# EAGLE board EZFOC_V1 (EAGLE 9.6.2), part 1 of 2
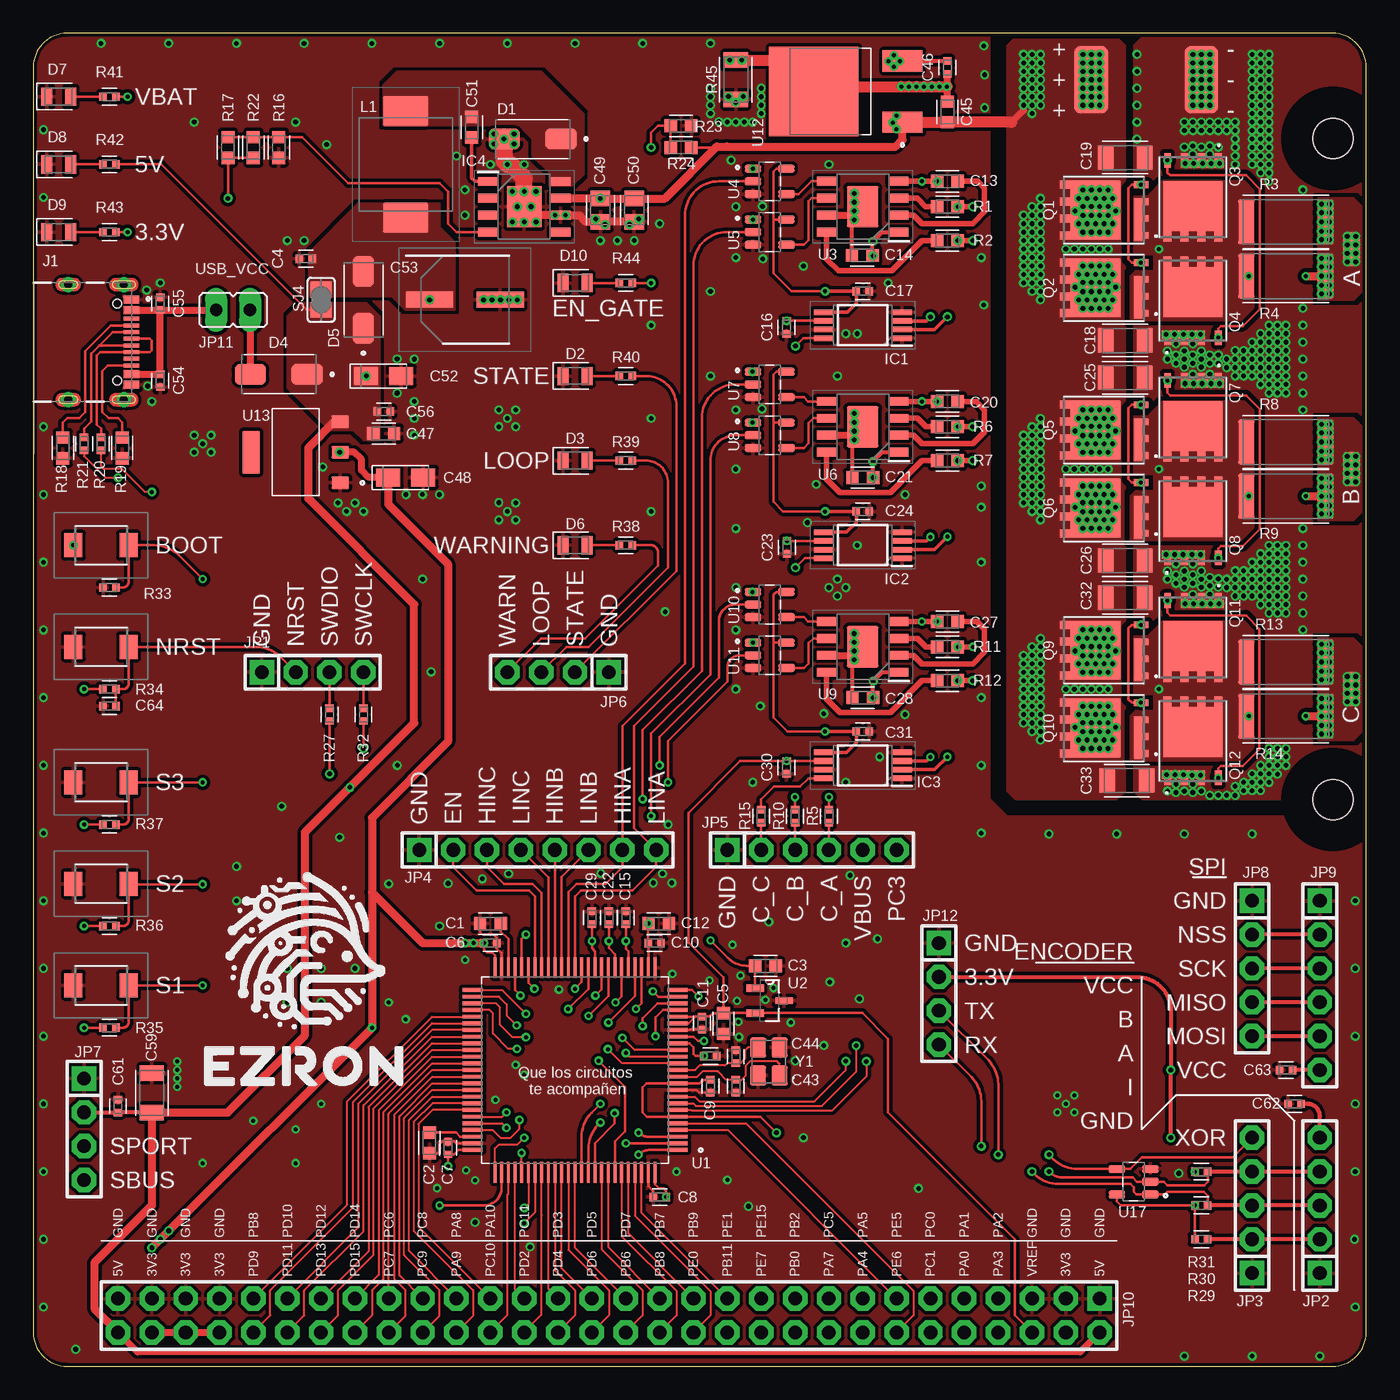
[diagram p0: board, top side]
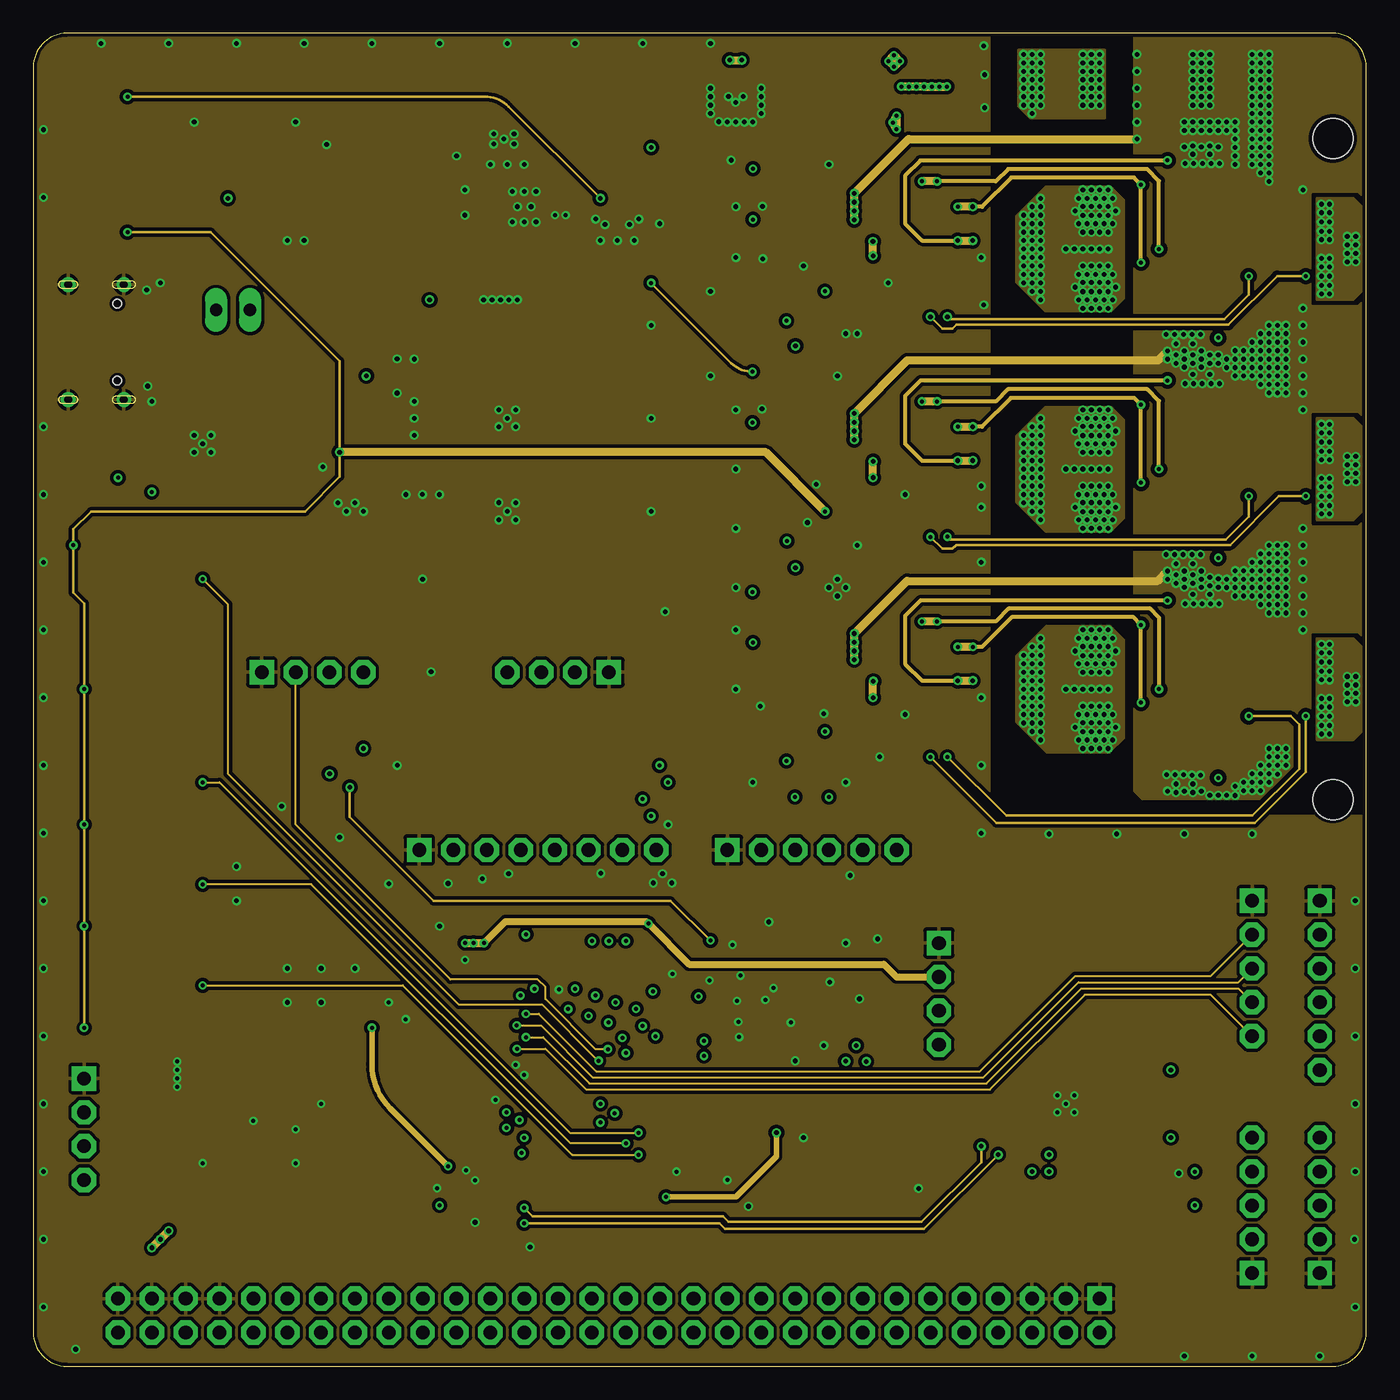
[diagram p1: board, inner layer Route2]
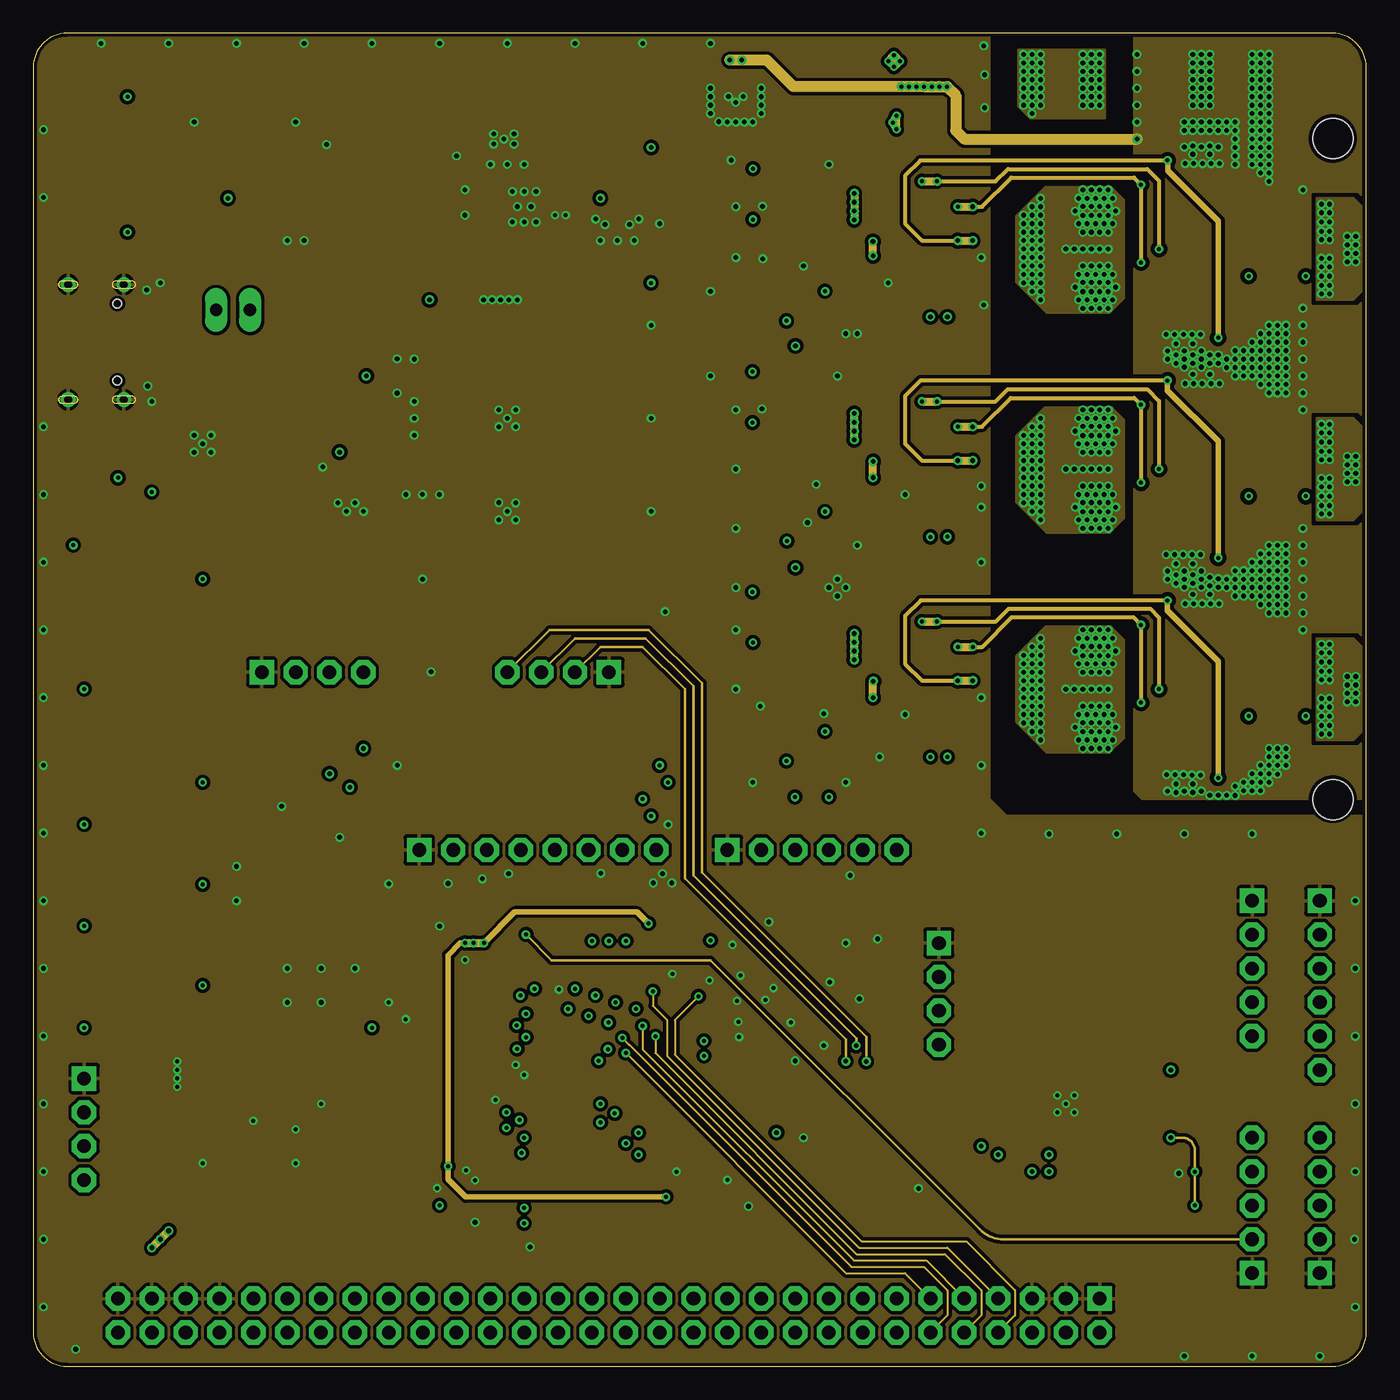
[diagram p2: board, inner layer Route15]
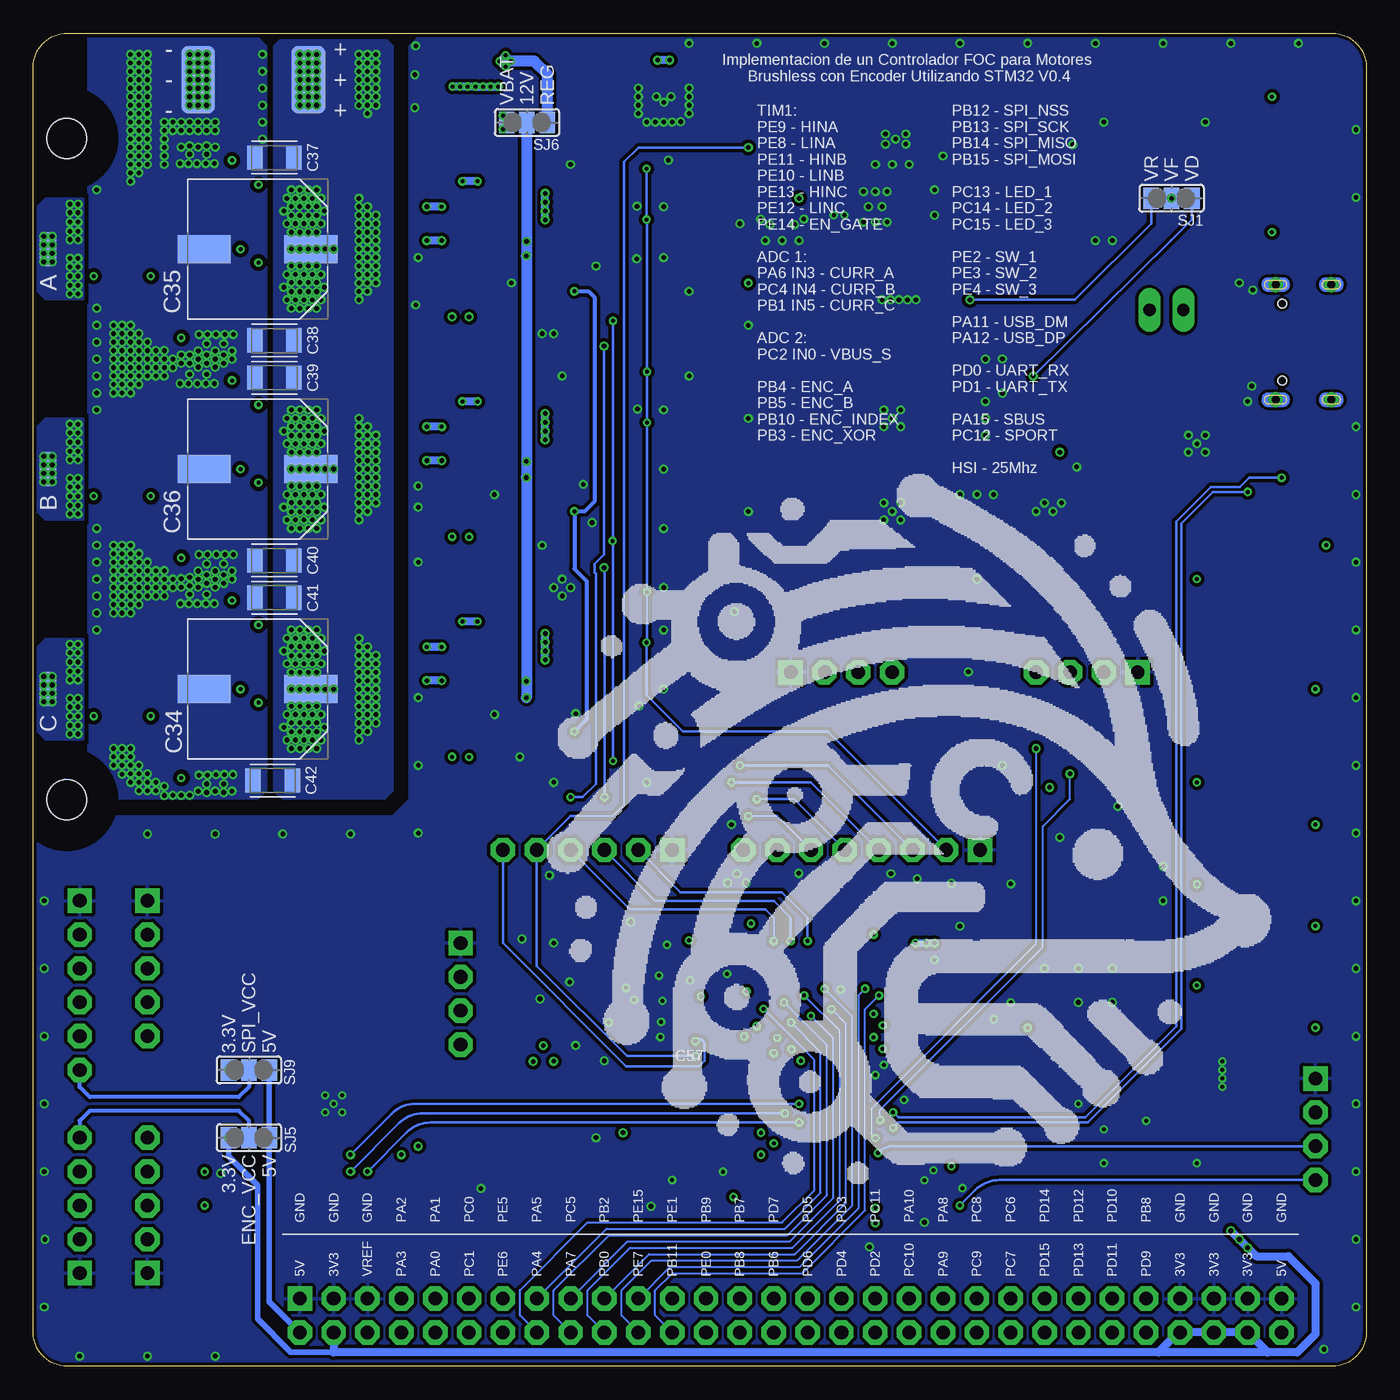
[diagram p3: board, bottom side, seen from below]

Size 100 x 100 mm. Coordinates in mm from the lower left corner, seen from the top.
Outline: 2.5,0 97.5,0 arc90 100,2.5 100,97.5 arc90 97.5,100 2.5,100 arc90 0,97.5 0,2.5 arc90 2.5,0
Copper layers (1+2*15+16): Top 0.035mm / dielectric 0.2mm / Route2 0.0175mm / dielectric 1.065mm / Route15 0.0175mm / dielectric 0.2mm / Bottom 0.035mm
Design rules "jlcpcb-4layers *": minimum track width 3.5mil, minimum drill 0.2mm, track to track 0.16mm, track to pad 0.2mm, pad to pad 5mil, via to via 0.5mm, smd to smd 5mil, copper to edge 0.2mm, drill to drill 6mil, minimum pad ring 10mil, minimum via ring 0.16mm, stop-mask expansion 0.05mm, vias tented up to drill 16mil, thermal gap 10mil
Net classes: 0 default: width 0.152 mm, drill 0.3 mm; 1 signal: width 0.152 mm, drill 0.3 mm
Holes 3 mm at 97.5,42.5 97.5,92.11
tRestrict: area 94,88.6 to 101,95.6; area 94,39 to 101,46
bRestrict: area 94,88.6 to 101,95.6; area 94,39 to 101,46

## Footprints (pad centres in the part's own frame; a part is rotated, then mirrored left to right if it is on the bottom)
SMD1,27-2,54 = smd 1.27 x 2.54: 1 0,0
SKRKAEE020 = smd 1.35 x 1.8: 1 -2.075,0; 2 2.075,0
0603 = smd 0.921 x 0.97: 1 -0.775,0; 2 0.775,0
0402 = smd 0.56 x 0.629: 1 -0.485,0; 2 0.485,0
1206 = smd 1.165 x 1.815: 1 -1.475,0; 2 1.475,0
CAPAE1030X1050N = smd 4 x 2.1: 1 -4,0; 2 4,0
CAPMP3216X180N = smd 1.796 x 1.35: 1 -1.31,0; 2 1.31,0
0805 = smd 1.165 x 1.465: 1 -0.875,0; 2 0.875,0
CAPAE660X800N = smd 3.55 x 1.2: 1 -2.65,0; 2 2.65,0
DIOM5226X240N = smd 2.33 x 1.55: A 2.135,0; C -2.135,0
LEDC2012X110N_FLAT-B = smd 0.8 x 1.362: A 0.9,0; C -0.9,0
SOP65P640X120-8N = smd 1.475 x 0.42: 1 -2.938,0.975; 2 -2.938,0.325; 3 -2.938,-0.325; 4 -2.938,-0.975; 5 2.938,-0.975; 6 2.938,-0.325; 7 2.938,0.325; 8 2.938,0.975
SOIC127P600X170-9N = smd 1.525 x 0.65: 1 -2.712,1.905; 2 -2.712,0.635; 3 -2.712,-0.635; 4 -2.712,-1.905; 5 2.712,-1.905; 6 2.712,-0.635; 7 2.712,0.635; 8 2.712,1.905 | smd 2.6 x 3.1: 9 0,0
GCT_USB4105-GF-A = smd 0.6 x 1.15: A1_B12 -3.2,4.755; A4_B9 -2.4,4.755; B1_A12 3.2,4.755; B4_A9 2.4,4.755 | smd 0.3 x 1.15: A5 -1.25,4.755; A6 -0.25,4.755; A7 0.25,4.755; A8 1.25,4.755; B5 1.75,4.755; B6 0.75,4.755; B7 -0.75,4.755; B8 -1.75,4.755 | drill 0.6 pad 1: SH1 -4.32,4.18; SH2 4.32,4.18; SH3 -4.32,0; SH4 4.32,0 | hole 0.65: 2.89,3.68; -2.89,3.68
1X04 = drill 1.016 square: 1 -3.81,0 | drill 1.016 octagon: 2 -1.27,0; 3 1.27,0; 4 3.81,0
1X05 = drill 1.016 square: 1 -5.08,0 | drill 1.016 octagon: 2 -2.54,0; 3 0,0; 4 2.54,0; 5 5.08,0
1X08 = drill 1.016 square: 1 -8.89,0 | drill 1.016 octagon: 2 -6.35,0; 3 -3.81,0; 4 -1.27,0; 5 1.27,0; 6 3.81,0; 7 6.35,0; 8 8.89,0
1X06 = drill 1.016 square: 1 -6.35,0 | drill 1.016 octagon: 2 -3.81,0; 3 -1.27,0; 4 1.27,0; 5 3.81,0; 6 6.35,0
2X30 = drill 1.016 square: 1 -38.1,-1.27 | drill 1.016 octagon: 2 -38.1,1.27; 3 -35.56,-1.27; 4 -35.56,1.27; 5 -33.02,-1.27; 6 -33.02,1.27; 7 -30.48,-1.27; 8 -30.48,1.27; 9 -27.94,-1.27; 10 -27.94,1.27; 11 -25.4,-1.27; 12 -25.4,1.27; 13 -22.86,-1.27; 14 -22.86,1.27; 15 -20.32,-1.27; 16 -20.32,1.27; 17 -17.78,-1.27; 18 -17.78,1.27; 19 -15.24,-1.27; 20 -15.24,1.27; 21 -12.7,-1.27; 22 -12.7,1.27; 23 -10.16,-1.27; 24 -10.16,1.27; 25 -7.62,-1.27; 26 -7.62,1.27; 27 -5.08,-1.27; 28 -5.08,1.27; 29 -2.54,-1.27; 30 -2.54,1.27; 31 0,-1.27; 32 0,1.27; 33 2.54,-1.27; 34 2.54,1.27; 35 5.08,-1.27; 36 5.08,1.27; 37 7.62,-1.27; 38 7.62,1.27; 39 10.16,-1.27; 40 10.16,1.27; 41 12.7,-1.27; 42 12.7,1.27; 43 15.24,-1.27; 44 15.24,1.27; 45 17.78,-1.27; 46 17.78,1.27; 47 20.32,-1.27; 48 20.32,1.27; 49 22.86,-1.27; 50 22.86,1.27; 51 25.4,-1.27; 52 25.4,1.27; 53 27.94,-1.27; 54 27.94,1.27; 55 30.48,-1.27; 56 30.48,1.27; 57 33.02,-1.27; 58 33.02,1.27; 59 35.56,-1.27; 60 35.56,1.27
JP1 = drill 0.914 long: 1 0,-1.27; 2 0,1.27
SMD6.6X7.3MM = smd 2.25 x 3.4: 1 -4,0; 2 4,0
SMD2,54-5,08 = smd 2.54 x 5.08: 1 0,0
TDSON-8FL = smd 0.5 x 0.5: 1 -2.764,1.905; 2 -2.764,0.635; 3 -2.764,-0.635 | smd 1.1 x 0.5: 4 -2.464,-1.905 | smd 0.8 x 0.6: 5 3.236,-1.905; 6 3.236,-0.635; 7 3.236,0.635; 8 3.236,1.905 | smd 3.75 x 4.41: 9 0.961,0 | smd 0.6 x 3.2: 10 -2.214,0.715
2512 = smd 1.231 x 3.37: 1 -2.97,0; 2 2.97,0
SJ_2 = smd 1.168 x 1.6: 1 -1.524,0; 2 0,0; 3 1.524,0
SJ = smd 1.168 x 1.6: 1 -0.762,0; 2 0.762,0
LQFP100 = smd 1.56 x 0.28: 1 -7.68,6; 2 -7.68,5.5; 3 -7.68,5; 4 -7.68,4.5; 5 -7.68,4; 6 -7.68,3.5; 7 -7.68,3; 8 -7.68,2.5; 9 -7.68,2; 10 -7.68,1.5; 11 -7.68,1; 12 -7.68,0.5; 13 -7.68,0; 14 -7.68,-0.5; 15 -7.68,-1; 16 -7.68,-1.5; 17 -7.68,-2; 18 -7.68,-2.5; 19 -7.68,-3; 20 -7.68,-3.5; 21 -7.68,-4; 22 -7.68,-4.5; 23 -7.68,-5; 24 -7.68,-5.5; 25 -7.68,-6; 51 7.68,-6; 52 7.68,-5.5; 53 7.68,-5; 54 7.68,-4.5; 55 7.68,-4; 56 7.68,-3.5; 57 7.68,-3; 58 7.68,-2.5; 59 7.68,-2; 60 7.68,-1.5; 61 7.68,-1; 62 7.68,-0.5; 63 7.68,0; 64 7.68,0.5; 65 7.68,1; 66 7.68,1.5; 67 7.68,2; 68 7.68,2.5; 69 7.68,3; 70 7.68,3.5; 71 7.68,4; 72 7.68,4.5; 73 7.68,5; 74 7.68,5.5; 75 7.68,6 | smd 0.28 x 1.56: 26 -6,-7.68; 27 -5.5,-7.68; 28 -5,-7.68; 29 -4.5,-7.68; 30 -4,-7.68; 31 -3.5,-7.68; 32 -3,-7.68; 33 -2.5,-7.68; 34 -2,-7.68; 35 -1.5,-7.68; 36 -1,-7.68; 37 -0.5,-7.68; 38 0,-7.68; 39 0.5,-7.68; 40 1,-7.68; 41 1.5,-7.68; 42 2,-7.68; 43 2.5,-7.68; 44 3,-7.68; 45 3.5,-7.68; 46 4,-7.68; 47 4.5,-7.68; 48 5,-7.68; 49 5.5,-7.68; 50 6,-7.68; 76 6,7.68; 77 5.5,7.68; 78 5,7.68; 79 4.5,7.68; 80 4,7.68; 81 3.5,7.68; 82 3,7.68; 83 2.5,7.68; 84 2,7.68; 85 1.5,7.68; 86 1,7.68; 87 0.5,7.68; 88 0,7.68; 89 -0.5,7.68; 90 -1,7.68; 91 -1.5,7.68; 92 -2,7.68; 93 -2.5,7.68; 94 -3,7.68; 95 -3.5,7.68; 96 -4,7.68; 97 -4.5,7.68; 98 -5,7.68; 99 -5.5,7.68; 100 -6,7.68
SOT95P237X112-3N = smd 1.321 x 0.559: 1 -1.092,0.94; 2 -1.092,-0.94 | smd 1.321 x 0.508: 3 1.092,0
SOIC127P600X170-9N' = smd 1.525 x 0.65: 1 -2.712,1.905; 2 -2.712,0.635; 3 -2.712,-0.635; 4 -2.712,-1.905; 5 2.712,-1.905; 6 2.712,-0.635; 7 2.712,0.635; 8 2.712,1.905 | smd 2.4 x 3.1: 9 0,0
SOT95P280X145-5N = smd 1.21 x 0.59: 1 -1.255,0.95; 2 -1.255,0; 3 -1.255,-0.95; 4 1.255,-0.95; 5 1.255,0.95
VREG_L78M12CDT-TR = smd 3 x 1.6: 1 -4.25,2.3; 3 -4.25,-2.3 | smd 6.7 x 6.7: 2 2.4,0
SOT229P700X180-4N = smd 1.31 x 0.93: 1 -3.345,2.29; 2 -3.345,0; 3 -3.345,-2.29 | smd 1.31 x 3.24: 4 3.345,0
SMD3225-4P = smd 1.5 x 1.2: 1 -1.05,-0.8; 2 1.05,-0.8; 3 1.05,0.8; 4 -1.05,0.8

## Placement (x,y rotation side)
A  PAD1.27X2.54  [SMD1,27-2,54]  98.9,83.81 0 bottom
A1  PAD1.27X2.54  [SMD1,27-2,54]  98.9,83.81 0 top
B  PAD1.27X2.54  [SMD1,27-2,54]  98.9,67.31 0 bottom
B1  PAD1.27X2.54  [SMD1,27-2,54]  98.9,67.31 0 top
BOOT  TS-1088  [SKRKAEE020]  5.08,61.59 180 top
C  PAD1.27X2.54  [SMD1,27-2,54]  98.9,50.8 0 bottom
C1  2.2uF  [0603]  34.29,33.21 180 top
C2  2.2uF  [0603]  29.72,16.76 270 top
C3  1uF  [0603]  54.93,30.03 0 top
C4  0.1uF  [0402]  20.45,83.08 180 top
C5  1uF  [0603]  51.78,25.71 270 top
C6  0.1uF  [0402]  34.29,31.74 0 top
C7  0.1uF  [0402]  31.11,16.38 90 top
C8  0.1uF  [0402]  46.99,12.7 180 top
C9  0.1uF  [0402]  50.8,21.01 270 top
C10  0.1uF  [0402]  46.61,31.74 0 top
C11  0.1uF  [0402]  50.16,25.74 270 top
C12  4.7uF  [0603]  46.93,33.21 0 top
C13  0.1uF  [0603]  68.58,88.9 180 top
C14  2.2uF  [0603]  62.2,83.34 180 top
C15  0.1uF  [0402]  44.45,33.65 90 top
C16  0.1uF  [0402]  56.52,77.94 270 top
C17  0.1uF  [0402]  62.23,80.64 0 top
C18  22uF  [1206]  81.92,76.96 0 top
C19  22uF  [1206]  81.92,90.67 0 top
C20  0.1uF  [0603]  68.58,72.38 180 top
C21  2.2uF  [0603]  62.23,66.67 180 top
C22  0.1uF  [0402]  43.18,33.65 90 top
C23  0.1uF  [0402]  56.55,61.43 270 top
C24  0.1uF  [0402]  62.23,64.13 0 top
C25  22uF  [1206]  81.92,74.16 0 top
C26  22uF  [1206]  81.92,60.45 0 top
C27  0.1uF  [0603]  68.58,55.88 180 top
C28  2.2uF  [0603]  62.23,50.16 180 top
C29  0.1uF  [0402]  41.91,33.65 90 top
C30  0.1uF  [0402]  56.52,44.92 270 top
C31  0.1uF  [0402]  62.23,47.62 0 top
C32  22uF  [1206]  81.92,57.65 0 top
C33  22uF  [1206]  82.04,43.94 0 top
C34  470uF  [CAPAE1030X1050N]  83.19,50.8 180 bottom
C35  470uF  [CAPAE1030X1050N]  83.19,83.81 180 bottom
C36  470uF  [CAPAE1030X1050N]  83.19,67.31 180 bottom
C37  22uF  [1206]  81.92,90.67 180 bottom
C38  22uF  [1206]  81.92,76.96 180 bottom
C39  22uF  [1206]  81.92,74.16 180 bottom
C40  22uF  [1206]  81.92,60.45 180 bottom
C41  22uF  [1206]  81.92,57.65 180 bottom
C42  22uF  [1206]  82.04,43.94 180 bottom
C43  12pF  [0402]  52.7,21.01 270 top
C44  12pF  [0402]  52.7,23.24 90 top
C45  1uF  [0603]  68.58,94.1 90 top
C46  0.1uF  [0402]  68.58,97.44 270 top
C47  1uF  [0603]  26.29,69.97 0 top
C48  10uF  [CAPMP3216X180N]  27.94,66.67 0 top
C49  10uF  [0805]  42.55,86.74 270 top
C50  10uF  [0805]  45.09,86.74 270 top
C51  0.01uF  [0603]  32.89,92.96 90 top
C52  10uF  [CAPMP3216X180N]  26.29,74.29 0 top
C53  220uF  [CAPAE660X800N]  32.38,80 0 top
C54  0.1uF  [0402]  9.53,73.94 270 top
C55  0.1uF  [0402]  9.53,79.72 90 top
C56  0.1uF  [0402]  26.29,71.62 0 top
C57  1nF  [0402]  50.8,23.27 0 top
C59  22uF  [1206]  8.89,20.51 90 top
C61  0.1uF  [0402]  6.35,19.52 90 top
C62  0.1uF  [0402]  94.61,19.68 180 top
C63  0.1uF  [0402]  93.98,22.22 180 top
C64  0.1uF  [0402]  5.71,49.52 180 top
C65  PAD1.27X2.54  [SMD1,27-2,54]  98.9,50.8 0 top
D1  B340A  [DIOM5226X240N]  37.47,92.07 180 top
D2  LED_BLUE  [LEDC2012X110N_FLAT-B]  40.64,74.29 0 top
D3  LED_BLUE  [LEDC2012X110N_FLAT-B]  40.64,67.94 0 top
D4  B340A  [DIOM5226X240N]  18.41,74.42 180 top
D5  B340A  [DIOM5226X240N]  24.77,80 90 top
D6  LED_BLUE  [LEDC2012X110N_FLAT-B]  40.64,61.59 0 top
D7  LED_BLUE  [LEDC2012X110N_FLAT-B]  1.91,95.25 0 top
D8  LED_BLUE  [LEDC2012X110N_FLAT-B]  1.91,90.16 0 top
D9  LED_BLUE  [LEDC2012X110N_FLAT-B]  1.91,85.09 0 top
D10  LED_BLUE  [LEDC2012X110N_FLAT-B]  40.64,81.28 0 top
IC1  INA240A1PW  [SOP65P640X120-8N]  62.23,78.1 180 top
IC2  INA240A1PW  [SOP65P640X120-8N]  62.23,61.59 180 top
IC3  INA240A1PW  [SOP65P640X120-8N]  62.23,45.08 180 top
IC4  TPS5430DDAR  [SOIC127P600X170-9N]  36.83,86.99 0 top
J1  TYPE-C_16PIN_2MD__073_C  [GCT_USB4105-GF-A]  2.62,76.83 270 top
JP1  [1X04]  20.95,52.06 0 top
JP2  [1X05]  96.52,12.06 90 top
JP3  [1X05]  91.44,12.06 90 top
JP4  [1X08]  37.85,38.73 0 top
JP5  [1X06]  58.42,38.73 0 top
JP6  [1X04]  39.37,52.06 180 top
JP7  [1X04]  3.81,17.77 270 top
JP8  [1X05]  91.44,29.84 270 top
JP9  [1X06]  96.52,28.57 270 top
JP10  [2X30]  41.91,3.8 180 top
JP11  [JP1]  14.99,79.24 270 top
JP12  [1X04]  67.94,27.94 270 top
L1  15uH  [SMD6.6X7.3MM]  27.94,90.16 270 top
NRST  TS-1088  [SKRKAEE020]  5.08,53.97 180 top
PAD1  PAD2.54X5.08  [SMD2,54-5,08]  79.38,96.52 0 bottom
PAD2  PAD2.54X5.08  [SMD2,54-5,08]  87.63,96.52 0 top
PAD3  PAD2.54X5.08  [SMD2,54-5,08]  87.63,96.52 0 bottom
PAD4  PAD2.54X5.08  [SMD2,54-5,08]  79.38,96.52 0 top
Q1  BSC011N03LSI_FL  [TDSON-8FL]  80.64,86.74 180 top
Q2  BSC011N03LSI_FL  [TDSON-8FL]  80.64,80.89 180 top
Q3  BSC011N03LSI_FL  [TDSON-8FL]  87,88.01 270 top
Q4  BSC011N03LSI_FL  [TDSON-8FL]  87,79.62 90 top
Q5  BSC011N03LSI_FL  [TDSON-8FL]  80.64,70.23 180 top
Q6  BSC011N03LSI_FL  [TDSON-8FL]  80.64,64.38 180 top
Q7  BSC011N03LSI_FL  [TDSON-8FL]  87,71.5 270 top
Q8  BSC011N03LSI_FL  [TDSON-8FL]  87,63.11 90 top
Q9  BSC011N03LSI_FL  [TDSON-8FL]  80.64,53.72 180 top
Q10  BSC011N03LSI_FL  [TDSON-8FL]  80.64,47.87 180 top
Q11  BSC011N03LSI_FL  [TDSON-8FL]  87,54.99 270 top
Q12  BSC011N03LSI_FL  [TDSON-8FL]  87,46.6 90 top
R1  1  [0603]  68.58,86.99 0 top
R2  1  [0603]  68.58,84.45 0 top
R3  1m  [2512]  93.98,85.85 0 top
R4  1m  [2512]  93.98,81.78 0 top
R5  10  [0402]  59.69,41.27 90 top
R6  1  [0603]  68.58,70.48 0 top
R7  1  [0603]  68.58,67.94 0 top
R8  1m  [2512]  93.98,69.34 0 top
R9  1m  [2512]  93.98,65.27 0 top
R10  10  [0402]  57.15,41.27 90 top
R11  1  [0603]  68.58,53.97 0 top
R12  1  [0603]  68.58,51.43 0 top
R13  1m  [2512]  93.98,52.83 0 top
R14  1m  [2512]  93.98,48.76 0 top
R15  10  [0402]  54.61,41.27 90 top
R16  1.6k  [0603]  18.41,91.44 90 top
R17  5.1k  [0603]  14.61,91.44 270 top
R18  5.1k  [0603]  2.22,68.89 270 top
R19  5.1k  [0603]  6.67,68.89 270 top
R20  22  [0402]  5.08,69.21 90 top
R21  22  [0402]  3.81,69.21 90 top
R22  2.4M  [0603]  16.51,91.44 270 top
R23  8.2k  [0603]  48.59,93.05 180 top
R24  75k  [0603]  48.59,91.44 180 top
R27  22  [0402]  22.23,48.89 90 top
R29  3.3k  [0402]  87.63,9.52 0 top
R30  3.3k  [0402]  87.63,12.06 0 top
R31  3.3k  [0402]  87.63,14.6 0 top
R32  22  [0402]  24.77,48.89 90 top
R33  10k  [0402]  5.71,58.41 180 top
R34  NC  [0402]  5.71,50.8 180 top
R35  10k  [0402]  5.71,25.39 180 top
R36  10k  [0402]  5.71,33.02 180 top
R37  10k  [0402]  5.71,40.63 180 top
R38  1k  [0402]  44.45,61.59 0 top
R39  1k  [0402]  44.45,67.94 0 top
R40  1k  [0402]  44.45,74.29 0 top
R41  12k  [0402]  5.71,95.25 0 top
R42  1k  [0402]  5.71,90.16 0 top
R43  1k  [0402]  5.71,85.09 0 top
R44  1k  [0402]  44.45,81.28 0 top
R45  0  [1206]  52.7,96.52 270 top
S1  TS-1088  [SKRKAEE020]  5.08,28.57 180 top
S2  TS-1088  [SKRKAEE020]  5.08,36.19 180 top
S3  TS-1088  [SKRKAEE020]  5.08,43.81 180 top
SJ1  [SJ_2]  14.61,87.62 180 bottom
SJ4  [SJ]  21.59,80 270 top
SJ5  [SJ_2]  83.82,17.14 180 bottom
SJ6  [SJ_2]  62.96,93.31 180 bottom
SJ9  [SJ_2]  83.82,22.22 180 bottom
U1  STM32H743VIT6  [LQFP100]  40.64,22.22 180 top
U2  REF3033AIDBZR  [SOT95P237X112-3N]  55.24,27.43 0 top
U3  UCC27211AQDDARQ1  [SOIC127P600X170-9N']  62.23,86.99 180 top
U4  SN74LVC1G08DBVR  [SOT95P280X145-5N]  55.24,88.9 0 top
U5  SN74LVC1G08DBVR  [SOT95P280X145-5N]  55.24,85.09 0 top
U6  UCC27211AQDDARQ1  [SOIC127P600X170-9N']  62.23,70.48 180 top
U7  SN74LVC1G08DBVR  [SOT95P280X145-5N]  55.24,73.66 0 top
U8  SN74LVC1G08DBVR  [SOT95P280X145-5N]  55.24,69.84 0 top
U9  UCC27211AQDDARQ1  [SOIC127P600X170-9N']  62.23,53.97 180 top
U10  SN74LVC1G08DBVR  [SOT95P280X145-5N]  55.24,57.14 0 top
U11  SN74LVC1G08DBVR  [SOT95P280X145-5N]  55.24,53.34 0 top
U12  L78M12CDT-TR  [VREG_L78M12CDT-TR]  60.96,95.63 180 top
U13  AMS1117-3.3  [SOT229P700X180-4N]  19.68,68.58 180 top
U17  SN74LVC1G86DBVR  [SOT95P280X145-5N]  82.55,13.84 180 top
Y1  CRISTAL_25MHZ_3225  [SMD3225-4P]  55.18,22.86 90 top

## Library data of the parts
A A1 B B1 C C65 PAD1-PAD4 = wirepad_edit
BOOT NRST S1-S3 = TS-1088; DESCRIPTION: Tactile Switches 3.9x2.9x2.0mm 160gf Packaging Temp 80oC; HEIGHT: 2mm; JLCPCB: C720477; MANUFACTURER_NAME: ALPS Electric; MANUFACTURER_PART_NUMBER: SKRKAEE020; MOUSER_PART_NUMBER: 688-SKRKAEE020; MOUSER_PRICE-STOCK: https://www.mouser.co.uk/ProductDetail/Alps-Alpine/SKRKAEE020?qs=MrosSN5%252BUQW89XjXIp8Ugw%3D%3D
C1 C2 C4 C6-C12 C15-C17 C22-C24 C29-C31 C43 C44 C46 C51 C54-C57 C61-C64 = 01_SMD_RLC; CATEGORY: Capacitor
C3 C5 C13 C18-C20 C25-C27 C32 C33 C37-C42 C45 C47 C49 C50 C59 = 01_SMD_RLC; CATEGORY: Capacitor; VOLTAGE_RATING: 35V
C14 C21 C28 = 01_SMD_RLC; CATEGORY: Capacitor; VOLTAGE_RATING: 16V
C34-C36 = 01_SMD_RLC; CATEGORY: Capacitor; JLCPCB: C2980172; VOLTAGE_RATING: 35V
C48 C52 = 01_SMD_RLC; CATEGORY: Capacitor; JLCPCB: C7171
C53 = 01_SMD_RLC; JLCPCB: C72494
D1 D4 D5 = B340A-13-F; AVAILABILITY: In Stock; CHECK_PRICES: https://www.snapeda.com/parts/B340A-13-F/Diodes+Inc./view-part/?ref=eda; DESCRIPTION: Schottky Diode 3A 40V 0.5Vf SMA | Diodes Inc B340A-13-F; JLCPCB: C8678; MF: Diodes Inc.; MP: B340A-13-F; PACKAGE: DO-214 Diodes Inc.; PRICE: None; SNAPEDA_LINK: https://www.snapeda.com/parts/B340A-13-F/Diodes+Inc./view-part/?ref=snap
D2 D3 = LED; CATEGORY: LED; COLOR: BLUE; DESCRIPTION: CHIP LED FLAT; JLCPCB: C965817; SUB-CATEGORY: CHIP; TYPE: FLAT_TOP
D6 = LED; CATEGORY: LED; COLOR: Yellow; DESCRIPTION: CHIP LED FLAT; JLCPCB: C2296; SUB-CATEGORY: CHIP; TYPE: FLAT_TOP
D7-D9 = LED; CATEGORY: LED; COLOR: BLUE; DESCRIPTION: CHIP LED FLAT; JLCPCB: C84256; SUB-CATEGORY: CHIP; TYPE: FLAT_TOP
D10 = LED; CATEGORY: LED; COLOR: BLUE; DESCRIPTION: CHIP LED FLAT; JLCPCB: C2297; SUB-CATEGORY: CHIP; TYPE: FLAT_TOP
IC1-IC3 = INA240A1PW; DESCRIPTION: Current Sense Amplifiers Voltage Output, High or Low Side Measurement, Bi-Directional Zer?-Drift Series 8-TSSOP -40 to 125; HEIGHT: 1.2mm; JLCPCB: C93965; MANUFACTURER_NAME: Texas Instruments; MANUFACTURER_PART_NUMBER: INA240A1PW; MOUSER_PART_NUMBER: 595-INA240A1PW; MOUSER_PRICE-STOCK: https://www.mouser.co.uk/ProductDetail/Texas-Instruments/INA240A1PW?qs=aVyJF2WnouQ4CUqAxLDbhw%3D%3D
IC4 = TPS5430DDAR; DESCRIPTION: Texas Instruments, TPS5430DDAR Step-Down Switching Regulator 3A Adjustable, 1.22 31 V, 8-Pin SOIC; HEIGHT: 1.7mm; JLCPCB: C9864; MANUFACTURER_NAME: Texas Instruments; MANUFACTURER_PART_NUMBER: TPS5430DDAR; MOUSER_PART_NUMBER: 595-TPS5430DDAR; MOUSER_PRICE-STOCK: https://www.mouser.co.uk/ProductDetail/Texas-Instruments/TPS5430DDAR?qs=zwk82MlA57ZJdOTovH1aYA%3D%3D
J1 = TYPE-C_16PIN_2MD__073_
JP1-JP10 JP12 = pinhead
JP11 SJ1 SJ4-SJ6 SJ9 = jumper
L1 = 01_SMD_RLC; JLCPCB: C2847544
Q1-Q12 = 02_Mosfets; JLCPCB: C534283
R1 R2 R5-R7 R10-R12 R15-R24 R27 R29-R44 = 01_SMD_RLC; CATEGORY: Resistor; SUB-CATEGORY: Fixed
R3 R4 R8 R9 R13 R14 = 01_SMD_RLC; CATEGORY: Resistor; JLCPCB: C7370895; SUB-CATEGORY: Fixed
R45 = 01_SMD_RLC; CATEGORY: Resistor; JLCPCB: C17888; SUB-CATEGORY: Fixed
U1 = 03_IC; AVAILABILITY: In Stock; CHECK_PRICES: https://www.snapeda.com/parts/STM32H743VIT6/STMicroelectronics/view-part/?ref=eda; DESCRIPTION: ARM® Cortex®-M7 STM32H7 Microcontroller IC 32-Bit Single-Core 480MHz 2MB (2M x 8) FLASH 100-LQFP (14x14); JLCPCB: C114409; MF: STMicroelectronics; MP: STM32H743VIT6; PACKAGE: LQFP-100 STMicroelectronics; PRICE: None; SNAPEDA_LINK: https://www.snapeda.com/parts/STM32H743VIT6/STMicroelectronics/view-part/?ref=snap
U2 = REF3033AIDBZR; AVAILABILITY: In Stock; CHECK_PRICES: https://www.snapeda.com/parts/REF3033AIDBZR/Texas+Instruments/view-part/?ref=eda; DESCRIPTION: 3.3-V, 50-ppm/°C, 50-µA in 3-pin SOT-23 package series (bandgap) voltage reference; JLCPCB: C36658; MF: Texas Instruments; MP: REF3033AIDBZR; PACKAGE: SOT-23-3 Texas Instruments; PRICE: None; SNAPEDA_LINK: https://www.snapeda.com/parts/REF3033AIDBZR/Texas+Instruments/view-part/?ref=snap
U3 U6 U9 = UCC27211AQDDARQ1; DESCRIPTION: 120-V Boot, 4-A Peak, High-Frequency High-Side and Low-Side Driver; HEIGHT: 1.7mm; JLCPCB: C485921; MANUFACTURER_NAME: Texas Instruments; MANUFACTURER_PART_NUMBER: UCC27211AQDDARQ1; MOUSER_PART_NUMBER: 595-UCC27211AQDDARQ1; MOUSER_PRICE-STOCK: https://www.mouser.co.uk/ProductDetail/Texas-Instruments/UCC27211AQDDARQ1?qs=n%252BTO0c4TDSYQNOcAHEGCfA%3D%3D
U4 U5 U7 U8 U10 U11 = SN74LVC1G08DBVR; AVAILABILITY: In Stock; CHECK_PRICES: https://www.snapeda.com/parts/SN74LVC1G08DBVR/Texas+Instruments/view-part/?ref=eda; DESCRIPTION: 1-ch, 2-input 1.65-V to 5.5-V 32 mA drive strength AND gate; JLCPCB: C7666; MF: Texas Instruments; MP: SN74LVC1G08DBVR; PACKAGE: SOT-23-5 Texas Instruments; PRICE: None; SNAPEDA_LINK: https://www.snapeda.com/parts/SN74LVC1G08DBVR/Texas+Instruments/view-part/?ref=snap
U12 = L78M12CDT-TR; AVAILABILITY: In Stock; CHECK_PRICES: https://www.snapeda.com/parts/L78M12CDT-TR/STMicroelectronics/view-part/?ref=eda; DESCRIPTION: Linear Voltage Regulator IC Positive Fixed 1 Output 500mA DPAK; JLCPCB: C16424; MF: STMicroelectronics; MP: L78M12CDT-TR; PACKAGE: DPAK STMicroelectronics; PRICE: None; SNAPEDA_LINK: https://www.snapeda.com/parts/L78M12CDT-TR/STMicroelectronics/view-part/?ref=snap
U13 = AMS1117-3.3; AVAILABILITY: Not in stock; CHECK_PRICES: https://www.snapeda.com/parts/AMS1117-3.3/Advanced+Monolithic+Systems/view-part/?ref=eda; DESCRIPTION: Sot223/Pkg 1-Amp 3.3-Volt Low Drop Out Voltage Regulatator; JLCPCB: C6186; MF: Advanced Monolithic Systems; MP: AMS1117-3.3; PACKAGE: SOT-223 Seeed Technology; PRICE: None; SNAPEDA_LINK: https://www.snapeda.com/parts/AMS1117-3.3/Advanced+Monolithic+Systems/view-part/?ref=snap
U17 = SN74LVC1G86DBVR; AVAILABILITY: In Stock; CHECK_PRICES: https://www.snapeda.com/parts/SN74LVC1G86DBVR/Texas+Instruments/view-part/?ref=eda; DESCRIPTION: Single 2-input, 1.65-V to 5.5-V XOR (exclusive OR) gate; JLCPCB: C402161; MF: Texas Instruments; MP: SN74LVC1G86DBVR; PACKAGE: SOT-23-5 Texas Instruments; PRICE: None; SNAPEDA_LINK: https://www.snapeda.com/parts/SN74LVC1G86DBVR/Texas+Instruments/view-part/?ref=snap
Y1 = Cristal_STM32; DESCRIPTION: Crystals 25.000MHz 18pF 20ppm -20 to +70; HEIGHT: 0.78mm; JLCPCB: C9006; MANUFACTURER_NAME: Diodes Inc.; MANUFACTURER_PART_NUMBER: FL2500047; MOUSER_PART_NUMBER: 729-FL2500047; MOUSER_PRICE-STOCK: https://www.mouser.com/Search/Refine.aspx?Keyword=729-FL2500047

## Nets
3V3: BOOT.2 C6.1 C7.1 C8.1 C9.1 C10.1 C12.1 C17.1 C24.1 C31.1 C48.1 IC1.5 IC2.5 IC3.5 JP10.4 JP10.54 JP10.56 JP10.58 JP12.2 R29.1 R30.1 R31.1 R34.2 R35.2 R36.2 R37.2 R43.2 SJ5.3 SJ9.3 U1.6 U1.11 U1.27 U1.50 U1.75 U1.100 U4.5 U5.5 U7.5 U8.5 U10.5 U11.5 U13.2 U17.5
5V: C3.1 C47.1 C52.1 C56.1 C59.1 C61.1 D4.C D5.C JP7.2 JP10.2 JP10.60 R42.2 SJ1.1 SJ4.2 SJ5.1 SJ9.1 U2.1 U13.3
5V_REG: C4.1 C53.1 D5.A L1.2 SJ1.3 SJ4.1
5V_USB: D4.A JP11.2
5V_VSEN: IC4.4 R16.2 R17.1 R22.1
12V: C14.1 C21.1 C28.1 SJ6.2 U3.1 U6.1 U9.1
12V_REG: C46.1 SJ6.1 U12.3
A: A1.1 A.1 IC1.3 R3.2 R4.2
B: B1.1 B.1 IC2.3 R8.2 R9.2
BOOT [signal]: BOOT.1 R33.1 U1.94
C: C65.1 C.1 IC3.3 R13.2 R14.2
C_A: IC1.8 R5.2
C_B: IC2.8 R10.2
C_C: IC3.8 R15.2
CURR_A: C15.1 JP5.4 R5.1 U1.30
CURR_B: C22.1 JP5.3 R10.1 U1.32
CURR_C: C29.1 JP5.2 R15.1 U1.35
EN_GATE [signal]: JP4.2 R44.2 U1.44 U4.1 U5.1 U7.1 U8.1 U10.1 U11.1
EN_GATE_R [signal]: D10.A R44.1
ENC_A [signal]: JP2.3 JP3.3 R30.2 U1.90 U17.1
ENC_B [signal]: JP2.4 JP3.4 R31.2 U1.91 U17.2
ENC_INDEX [signal]: JP2.2 JP3.2 R29.2 U1.46
ENC_VCC [signal]: C62.1 JP2.5 SJ5.2
ENC_XOR [signal]: JP3.5 U1.89 U17.4
GND: C1.2 C2.2 C3.2 C4.2 C5.2 C6.2 C7.2 C8.2 C9.2 C10.2 C11.2 C12.2 C15.2 C16.2 C17.2 C22.2 C23.2 C24.2 C29.2 C30.2 C31.2 C43.2 C44.2 C47.2 C48.2 C49.2 C50.2 C52.2 C53.2 C54.2 C55.2 C56.2 C57.2 C59.2 C61.2 C62.2 C63.2 C64.2 D1.A D2.C D3.C D6.C D7.C D8.C D9.C D10.C IC1.1 IC1.4 IC1.7 IC2.1 IC2.4 IC2.7 IC3.1 IC3.4 IC3.7 IC4.6 IC4.9 J1.A1_B12 J1.B1_A12 J1.SH1 J1.SH2 J1.SH3 J1.SH4 JP1.1 JP2.1 JP3.1 JP4.1 JP5.1 JP6.1 JP7.1 JP8.1 JP9.1 JP10.1 JP10.3 JP10.5 JP10.53 JP10.55 JP10.57 JP10.59 JP12.1 NRST.2 R16.1 R18.2 R19.2 R23.1 R33.2 R45.2 S1.2 S2.2 S3.2 U1.10 U1.19 U1.26 U1.49 U1.74 U1.99 U2.3 U4.3 U5.3 U7.3 U8.3 U10.3 U11.3 U13.1 U17.3 Y1.2 Y1.4
HBA: C13.1 U3.2
HBB: C20.1 U6.2
HBC: C27.1 U9.2
HGA: Q1.4 Q2.4 R1.2
HGB: Q5.4 Q6.4 R6.2
HGC: Q9.4 Q10.4 R11.2
HIA: U3.5 U4.4
HIB: U6.5 U7.4
HIC: U9.5 U10.4
HINA [signal]: JP4.7 U1.39 U4.2
HINB [signal]: JP4.5 U1.41 U7.2
HINC [signal]: JP4.3 U1.43 U10.2
HOA: R1.1 U3.3
HOB: R6.1 U6.3
HOC: R11.1 U9.3
HSA: C13.2 IC1.2 Q1.1 Q1.2 Q1.3 Q1.10 Q2.1 Q2.2 Q2.3 Q2.10 Q3.5 Q3.6 Q3.7 Q3.8 Q3.9 Q4.5 Q4.6 Q4.7 Q4.8 Q4.9 R3.1 R4.1 U3.4
HSB: C20.2 IC2.2 Q5.1 Q5.2 Q5.3 Q5.10 Q6.1 Q6.2 Q6.3 Q6.10 Q7.5 Q7.6 Q7.7 Q7.8 Q7.9 Q8.5 Q8.6 Q8.7 Q8.8 Q8.9 R8.1 R9.1 U6.4
HSC: C27.2 IC3.2 Q9.1 Q9.2 Q9.3 Q9.10 Q10.1 Q10.2 Q10.3 Q10.10 Q11.5 Q11.6 Q11.7 Q11.8 Q11.9 Q12.5 Q12.6 Q12.7 Q12.8 Q12.9 R13.1 R14.1 U9.4
LED1R [signal]: D6.A R38.1
LED2R [signal]: D3.A R39.1
LED3R [signal]: D2.A R40.1
LED4R [signal]: D7.A R41.1
LED5R [signal]: D8.A R42.1
LED6R [signal]: D9.A R43.1
LED_LOOP [signal]: JP6.3 R39.2 U1.8
LED_STATE [signal]: JP6.2 R40.2 U1.9
LED_WARNING [signal]: JP6.4 R38.2 U1.7
LGA: Q3.4 Q4.4 R2.2
LGB: Q7.4 Q8.4 R7.2
LGC: Q11.4 Q12.4 R12.2
LIA: U3.6 U5.4
LIB: U6.6 U8.4
LIC: U9.6 U11.4
LINA [signal]: JP4.8 U1.38 U5.2
LINB [signal]: JP4.6 U1.40 U8.2
LINC [signal]: JP4.4 U1.42 U11.2
LOA: R2.1 U3.8
LOB: R7.1 U6.8
LOC: R12.1 U9.8
NRST [signal]: C64.1 JP1.2 NRST.1 R34.1 U1.14
OSC_IN: C43.1 U1.12 Y1.1
OSC_OUT: C44.1 U1.13 Y1.3
PA0: JP10.10 U1.22
PA1: JP10.9 U1.23
PA2: JP10.7 U1.24
PA3: JP10.8 U1.25
PA4: JP10.16 U1.28
PA5: JP10.15 U1.29
PA7: JP10.18 U1.31
PA8: JP10.39 U1.67
PA9: JP10.40 U1.68
PA10: JP10.37 U1.69
PB0: JP10.20 U1.34
PB2: JP10.19 U1.36
PB6: JP10.30 U1.92
PB7: JP10.27 U1.93
PB8: JP10.28 U1.95
PB9: JP10.25 U1.96
PB11: JP10.24 U1.47
PC0: JP10.11 U1.15
PC1: JP10.12 U1.16
PC3: JP5.6 U1.18
PC5: JP10.17 U1.33
PC6: JP10.43 U1.63
PC7: JP10.44 U1.64
PC8: JP10.41 U1.65
PC9: JP10.42 U1.66
PC10: JP10.38 U1.78
PC11: JP10.35 U1.79
PD2: JP10.36 U1.83
PD3: JP10.33 U1.84
PD4: JP10.34 U1.85
PD5: JP10.31 U1.86
PD6: JP10.32 U1.87
PD7: JP10.29 U1.88
PD8: JP10.51 U1.55
PD9: JP10.52 U1.56
PD10: JP10.49 U1.57
PD11: JP10.50 U1.58
PD12: JP10.47 U1.59
PD13: JP10.48 U1.60
PD14: JP10.45 U1.61
PD15: JP10.46 U1.62
PE0: JP10.26 U1.97
PE1: JP10.23 U1.98
PE5: JP10.13 U1.4
PE6: JP10.14 U1.5
PE7: JP10.22 U1.37
PE15: JP10.21 U1.45
REG_BOOT: C51.1 IC4.1
REG_PH: C51.2 D1.C IC4.8 L1.1
SBUS: JP7.4 U1.77
SJ1_SEL: R17.2 R22.2 SJ1.2
SPI_MISO [signal]: JP8.4 JP9.4 U1.53
SPI_MOSI [signal]: JP8.5 JP9.5 U1.54
SPI_NSS [signal]: JP8.2 JP9.2 U1.51
SPI_SCK [signal]: JP8.3 JP9.3 U1.52
SPI_VCC [signal]: C63.1 JP9.6 SJ9.2
SPORT [signal]: JP7.3 U1.80
SW_1 [signal]: R35.1 S1.1 U1.1
SW_2 [signal]: R36.1 S2.1 U1.2
SW_3 [signal]: R37.1 S3.1 U1.3
SWCLK: R32.1 U1.76
SWCLK_R [signal]: JP1.4 R32.2
SWDIO: R27.1 U1.72
SWDIO_R [signal]: JP1.3 R27.2
UART_RX [signal]: JP12.4 U1.81
UART_TX [signal]: JP12.3 U1.82
USB_CC1: J1.B5 R19.1
USB_CC2: J1.A5 R18.1
USB_D_N: R21.1 U1.70
USB_D_P: R20.1 U1.71
USB_DN_R: J1.A7 J1.B7 R21.2
USB_DP_R: J1.A6 J1.B6 R20.2
USB_VBUS: C54.1 C55.1 J1.A4_B9 J1.B4_A9 JP11.1
VBUS_S: C57.1 JP5.5 R23.2 R24.2 U1.17
VCAP1: C1.1 U1.48
VCAP2: C2.1 U1.73
VDD: C18.1 C19.1 C25.1 C26.1 C32.1 C33.1 C34.1 C35.1 C36.1 C37.1 C38.1 C39.1 C40.1 C41.1 C42.1 C45.1 C49.1 C50.1 IC4.7 PAD1.1 PAD4.1 Q1.5 Q1.6 Q1.7 Q1.8 Q1.9 Q2.5 Q2.6 Q2.7 Q2.8 Q2.9 Q5.5 Q5.6 Q5.7 Q5.8 Q5.9 Q6.5 Q6.6 Q6.7 Q6.8 Q6.9 Q9.5 Q9.6 Q9.7 Q9.8 Q9.9 Q10.5 Q10.6 Q10.7 Q10.8 Q10.9 R24.1 R41.2 SJ6.3 U12.1
VREF: C5.1 C11.1 C16.1 C23.1 C30.1 IC1.6 IC2.6 IC3.6 JP10.6 U1.20 U1.21 U2.2
VSS: C14.2 C18.2 C19.2 C21.2 C25.2 C26.2 C28.2 C32.2 C33.2 C34.2 C35.2 C36.2 C37.2 C38.2 C39.2 C40.2 C41.2 C42.2 C45.2 C46.2 PAD2.1 PAD3.1 Q3.1 Q3.2 Q3.3 Q3.10 Q4.1 Q4.2 Q4.3 Q4.10 Q7.1 Q7.2 Q7.3 Q7.10 Q8.1 Q8.2 Q8.3 Q8.10 Q11.1 Q11.2 Q11.3 Q11.10 Q12.1 Q12.2 Q12.3 Q12.10 R45.1 U3.7 U3.9 U6.7 U6.9 U9.7 U9.9 U12.2